# Altium PCB Boosty.PcbDoc
Units mm, origin at the board's own origin, x right, y up, seen from the top; angles counter-clockwise.
Board outline 152.4 x 101.6 mm, 2 copper layers (Top Layer, Bottom Layer); 44 components, 30 nets, 134 pads, 0 vias.
Unrouted connection lines stored in the file: 100.
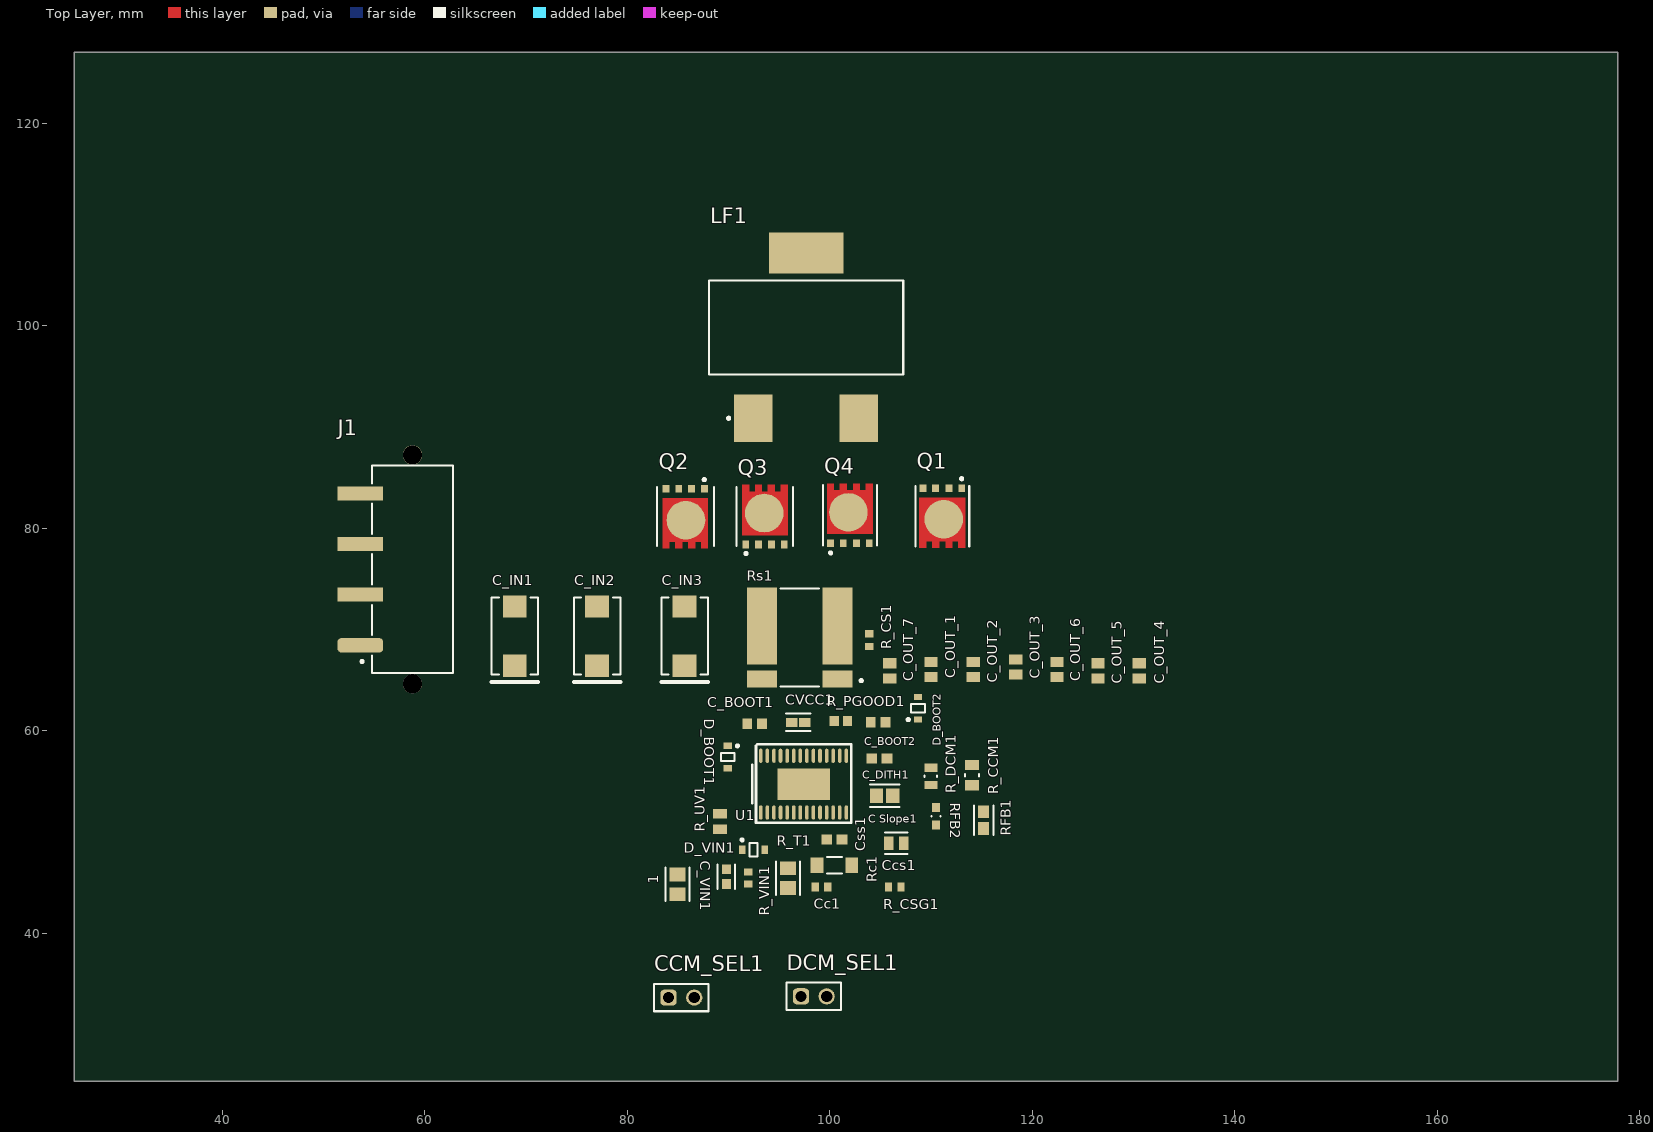
[diagram p0: Top Layer view]
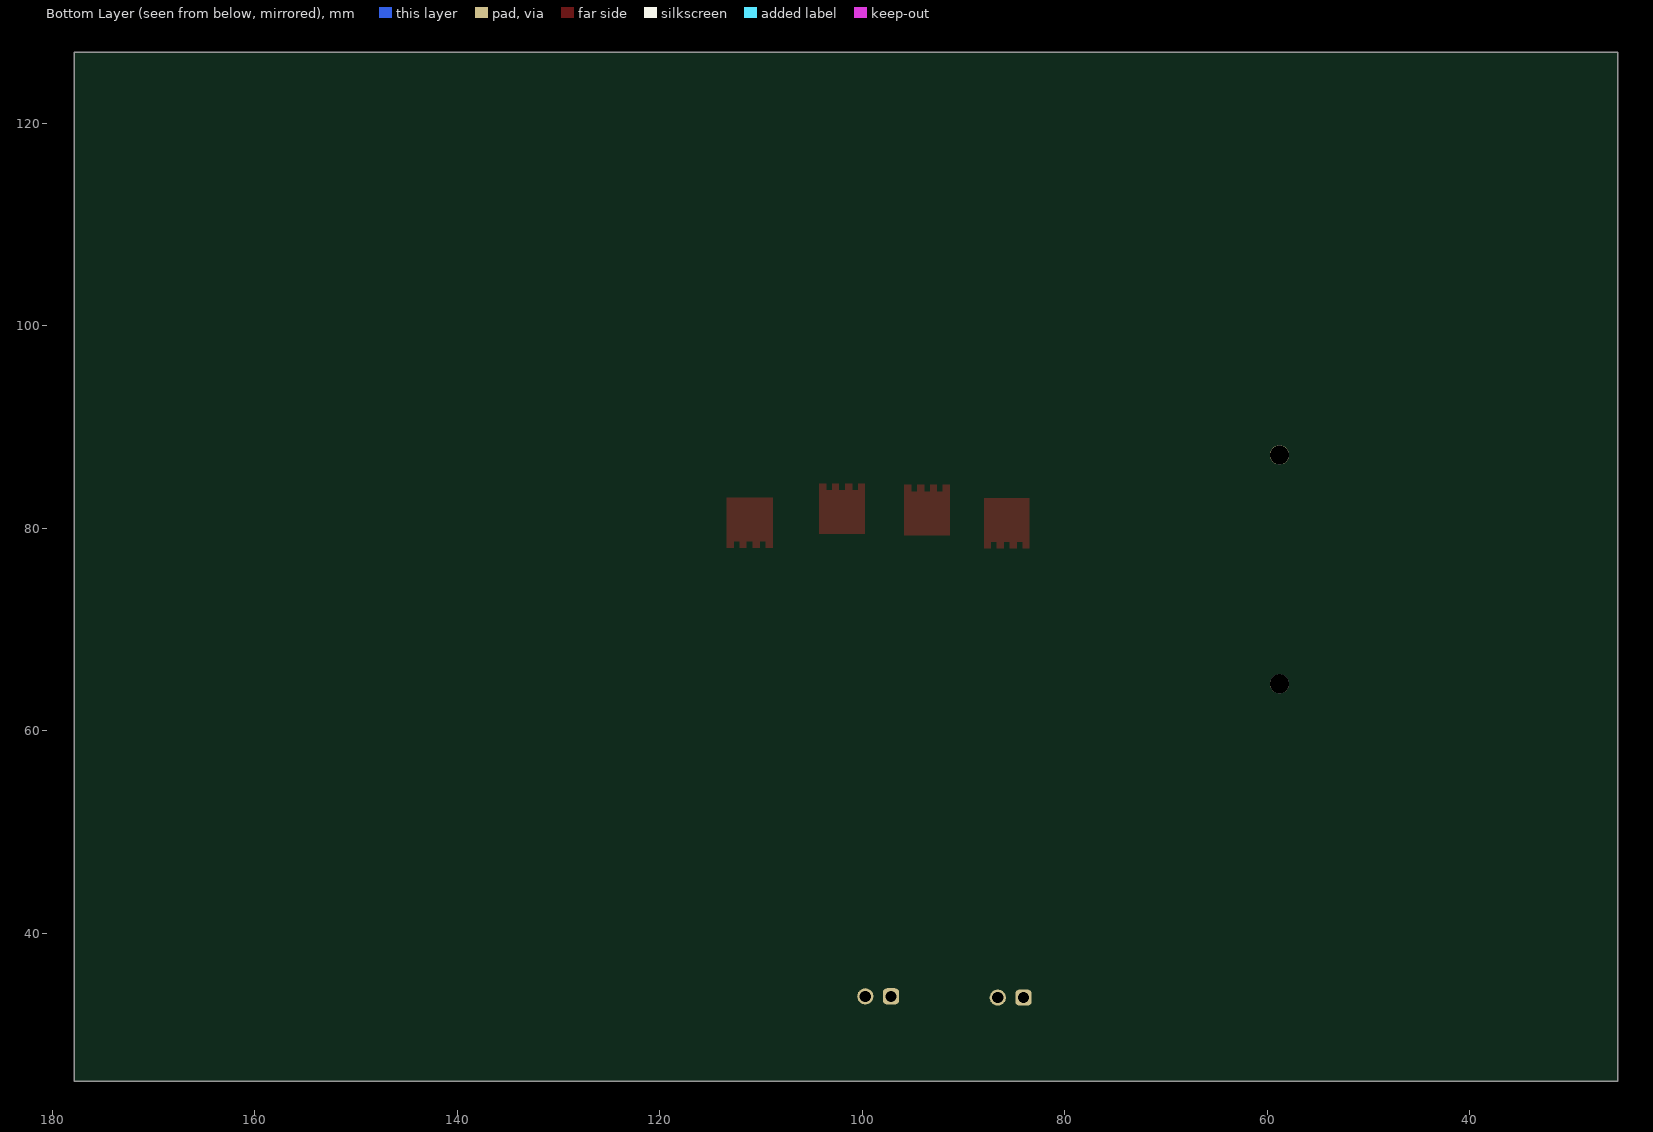
[diagram p1: Bottom Layer view, seen from below]

## Layer stack, top to bottom
Top Solder: solder mask 0.0102, Solder Resist, Dk 3.5
Top Layer: signal copper 0.0356
Dielectric 1: dielectric 0.32, FR-4, Dk 4.8
Bottom Layer: signal copper 0.0356
Bottom Solder: solder mask 0.0102, Solder Resist, Dk 3.5

## Board outline
25.4,25.4 177.8,25.4 177.8,127 25.4,127

## Design rules (kind name [scope] priority, off if disabled: settings)
BoardOutlineClearance [All] p1: gap=0.3 ignorepadtopadclearanceinfootprint=FALSE except(0.4: Arc-SplitBarrior Arc-SplitContinuation Track-SplitBarrior Track-SplitContinuation SMDPad-SplitBarrior SMDPad-SplitContinuation THPad-SplitBarrior THPad-SplitContinuation Via-SplitBarrior Via-SplitContinuation Fill-SplitBarrior Fill-SplitContinuation Poly-SplitBarrior Poly-SplitContinuation Region-SplitBarrior Region-SplitContinuation Text-SplitBarrior Text-SplitContinuation)
Clearance "Clearance Different Nets" [All] p1: gap=0.2 ignorepadtopadclearanceinfootprint=FALSE except(0.089: Arc-Arc Arc-Track Arc-SMDPad Track-Track Track-SMDPad; 0.127: SMDPad-SMDPad SMDPad-Via THPad-Via Via-Via; 0.254: Arc-Via Arc-Text Track-Via Track-Text SMDPad-Text THPad-Text Via-Text Fill-Text Poly-Text Region-Text Text-Text; 0.5: THPad-THPad Via-Hole)
Clearance "Clearance Same Nets" [All] p2: gap=0.2 ignorepadtopadclearanceinfootprint=FALSE except(0.089: Arc-Arc Arc-Track Arc-SMDPad Track-Track Track-SMDPad SMDPad-SMDPad; 0.127: SMDPad-Via THPad-Via; 0.254: Arc-Via Arc-Text Track-Via Track-Text SMDPad-Text THPad-Text Via-Via Via-Text Fill-Text Poly-Text Region-Text Text-Text)
Clearance "Clearance Bottom Layer" [OnLayer('Bottom Layer')] p3: gap=0.203 ignorepadtopadclearanceinfootprint=TRUE except(0.254: Arc-Text Track-Text SMDPad-Text THPad-Text Via-Text Fill-Text Poly-Text Region-Text Text-Text)
Clearance "Clearance Top Layer" [OnLayer('Top Layer')] p4: gap=0.203 ignorepadtopadclearanceinfootprint=TRUE except(0.254: Arc-Text Track-Text SMDPad-Text THPad-Text Via-Text Fill-Text Poly-Text Region-Text Text-Text)
HoleSize [All] p1: absolutevalues=TRUE maxlimit=6.3 minlimit=0.2 maxpercent=80.000 minpercent=20.000
MinimumAnnularRing [All] p1: minimumring=0.13
MinimumSolderMaskSliver [All] p1: minsoldermaskwidth=0.1
PolygonConnect PolygonConnect_1 [All] p1: thpad.connectstyle=Relief thpad.reliefconductorwidth=0.508 thpad.reliefentries=4 thpad.polygonreliefangle="90 Angle" thpad.airgapwidth=0.254 smdpad.connectstyle=Relief smdpad.reliefconductorwidth=0.508 smdpad.reliefentries=4 smdpad.polygonreliefangle="90 Angle" smdpad.airgapwidth=0.254 via.connectstyle=Direct via.reliefconductorwidth=0.508 via.reliefentries=4 via.polygonreliefangle="90 Angle" via.airgapwidth=0.254
RoutingCorners [All] p1: cornerstyle=Round minsetback=2.54 maxsetback=2.54
RoutingVias [All] p1: holewidth=0.5 width=1 viastyle="Through Hole" minholewidth=0.2 minwidth=0.35 maxholewidth=1 maxwidth=2
SilkToSilkClearance [All] p1: silktosilkclearance=0.1
SilkToSolderMaskClearance [IsPad] p1: minsilkscreentomaskgap=0.1 clearancetoexposedcopper=TRUE
SolderMaskExpansion [All] p1: expansion=0.102 istentingtop=FALSE
Width [All] p1: maxlimit=2.54 minlimit=0.089 preferedwidth=0.381
25 further rules are at their usual default settings.

## Classes and differential pairs
component class Boosty: 1 "C Slope1" C_BOOT1 C_BOOT2 C_DITH1 C_IN1 C_IN2 C_IN3 C_OUT_1 C_OUT_2 C_OUT_3 C_OUT_7 C_VIN1 Cc1 CCM_SEL1 Ccs1 Css1 CVCC1 D_BOOT1 D_BOOT2 D_VIN1 DCM_SEL1 J1 LF1 Q1 Q2 Q4 R_CCM1 R_CS1 R_CSG1 R_DCM1 R_PGOOD1 R_T1 R_UV1 R_VIN1 Rc1 RFB2 Rs1 U1

## Components (designator, comment, footprint, x,y, rotation, side; value= is the part's Value field where it differs from the comment)
1 "RUV2" FP-RG2012-IPC_A 84.963,44.831 r90 top
"C Slope1" "150pF" FP-0805-L_2_01_0_2-W_1_25-IPC_B 105.41,53.594 r180 top
C_BOOT1 "0.1uF" CAPC1608X90X35ML10T15 92.583,60.706 r0 top value=100nF
C_BOOT2 "0.1uF" CAPC1608X90X35ML10T15 104.775,60.833 r180 top value=100nF
C_DITH1 "39nF" CAPC1608X90X35NL15T15 104.902,57.277 r180 top
C_IN1 "293D106X9050E2TE3" VISH-293D-E_L 68.897,69.342 r90 top
C_IN2 "293D106X9050E2TE3" VISH-293D-E_L 77.025,69.342 r90 top
C_IN3 "293D106X9050E2TE3" VISH-293D-E_L 85.661,69.342 r90 top
C_OUT_1 "GRM21BR71H473KA01L" CAPC2013X135X45LL10T25 109.982,66.052 r90 top
C_OUT_2 "GRM21BR71H473KA01L" CAPC2013X135X45LL10T25 114.173,66.052 r90 top
C_OUT_3 "GRM21BR71H473KA01L" CAPC2013X135X45LL10T25 118.364,66.306 r90 top
C_OUT_4 "GRM21BR71H473KA01L" CAPC2013X135X45LL10T25 130.556,65.925 r90 top
C_OUT_5 "GRM21BR71H473KA01L" CAPC2013X135X45LL10T25 126.492,65.925 r90 top
C_OUT_6 "GRM21BR71H473KA01L" CAPC2013X135X45LL10T25 122.428,66.052 r90 top
C_OUT_7 "GRM21BR71H473KA01L" CAPC2013X135X45LL10T25 105.918,65.925 r90 top
C_VIN1 "GRM188R72A104KA35D" FP-GRM188-0_1-e0_2_0_5-IPC_B 89.789,45.593 r270 top
Cc1 "0.33nF" CAPC1608X92X38LL15T08 99.187,44.577 r0 top
CCM_SEL1 "61300211121" 61300211121 85.344,33.655 r0 top
Ccs1 "100pF" FP-C0805C-DN-MFG 106.553,48.895 r0 top value="100 pF"
Css1 "47nF" CAPC1608X90X35NL15T15 100.457,49.276 r180 top
CVCC1 "C1608X5R1H105K080AB" FP-C1608-080-0_1-IPC_B 96.901,60.833 r180 top value=1uF
D_BOOT1 "Shottkley" ONSC-SOD-323-2-477-02_V 89.916,57.404 r270 top
D_BOOT2 "Shottkley" ONSC-SOD-323-2-477-02_V 108.712,62.23 r90 top
D_VIN1 "Shottkley" ONSC-SOD-323-2-477-02_V 92.456,48.26 r0 top
DCM_SEL1 "61300211121" 61300211121 98.425,33.782 r0 top
J1 "691709710304" 691709710304 58.801,75.946 r90 top
LF1 "SER2011-202MLD" COIL-SER2011-3_V 97.663,99.822 r0 top
Q1 "CSD16321Q5" FP-DQH0008A-0 111.111,81.191 r270 top
Q2 "CSD18563Q5A" FP-DQJ0008A-MFG 85.725,81.153 r270 top
Q3 "CSD18563Q5A" FP-DQJ0008A-MFG 93.599,81.153 r90 top
Q4 "CSD16321Q5" FP-DQH0008A-0 101.981,81.28 r90 top
R_CCM1 "93.1k" FP-RN732A-MFG 114.046,55.626 r90 top value=93.1KΩ
R_CS1 "100ohm" RESC1608X55X30LL15T15 103.886,68.961 r270 top
R_CSG1 "100ohm" RESC1608X55X30LL15T15 106.426,44.577 r0 top
R_DCM1 "49.9k" FP-CRCW0805-e3-IPC_C 109.982,55.499 r90 top
R_PGOOD1 "ERA-3YEB203V" RESC1608X55X30NL20T20 101.092,60.96 r180 top
R_T1 "61.9K" FP-RG2012-IPC_A 95.885,45.466 r90 top value=61.9kR
R_UV1 "200k 0805" RESC2013X70X40LL20T20 89.154,51.054 r270 top
R_VIN1 "2.2" RESC1609X50X30LL10T20 91.948,45.466 r90 top
Rc1 "24.3k" FP-CR1206-MFG 100.457,46.736 r180 top
RFB1 "3.48k" FP-ERA3A-IPC_A 115.189,51.181 r270 top value=3.48kR
RFB2 "100k" FP-RC0603-0_55-MFG 110.49,51.562 r270 top value=100kR
Rs1 "4m" FP-WSL3637-MFG 97.028,69.215 r180 top
U1 "LM5175PWPR" LM5175PWPR 97.409,54.737 r90 top

## Footprints (in the part's own frame and the unit in brackets; to place one, negate y for a bottom-side part, rotate by r counter-clockwise, add the part's x,y. Pads: shape width x height; smd on the part's side, far side on the other; paste and mask are expansions set on the pad)
61300211121 [mm] "Pin Header, pitch 2.54 mm, THT, Vertical, single row, 2p"
  rrect50% 1.6x1.6 hole 1.1: 1(-1.27,0)
  round 1.6 hole 1.1: 2(1.27,0)
  silkscreen extent -2.69,-1.35 2.69,1.35, body extent -2.54,-1.27 2.54,1.27, height 8.57
691709710304 [mm] "Horizontal Entry SMT with Pressure Clamp, pitch 5mm, 04p"
  rrect50% 1.4x4.5 smd: 1(-7.5,5.15)
  rect 1.4x4.5 smd: 2(-2.5,5.15) 3(2.5,5.15) 4(7.5,5.15)
  round 1.9 hole 1.9 unplated: M1(-11.3,0) M2(11.3,0)
  silkscreen extent -10.25,-4 10.25,5.1, body extent -12,-4 12,7, height 9.95
CAPC1608X90X35ML10T15 [mm] "Chip Capacitor, 2-Leads, Body 1.7x0.9mm, IPC Low Density"
  rect 0.95x1.05 smd: 1(-0.725,0) 2(0.725,0)
  body extent -0.85,-0.45 0.85,0.45, height 0.9
CAPC1608X90X35NL15T15 [mm] "Chip Capacitor, 2-Leads, Body 1.60x0.81mm, IPC Medium Density"
  rect 1.05x1 smd: 1(-0.75,0) 2(0.75,0)
  body extent -0.88,-0.48 0.87,0.48, height 0.9
CAPC1608X92X38LL15T08 [mm] "Chip Capacitor, 2-Leads, Body 1.60x0.80mm, IPC High Density"
  rect 0.75x0.9 smd: 1(-0.625,0) 2(0.625,0)
  body extent -0.87,-0.48 0.87,0.48, height 0.92
CAPC2013X135X45LL10T25 [mm] "Chip Capacitor, 2-Leads, Body 2.00x1.25mm, IPC High Density"
  rect 1x1.3 smd: 1(-0.75,0) 2(0.75,0)
  body extent -1.05,-0.67 1.05,0.68, height 1.35
COIL-SER2011-3_V [mm] "SMD, 3-Leads, Body 19.18x9.27mm, Height 10.67mm"
  rect 3.81x4.7 smd: 1(-5.205,-8.96) 2(5.205,-8.96)
  rect 7.37x4.06 smd: 3(0,7.36)
  silkscreen extent -9.59,-9.08 9.59,4.63, body extent -9.59,-4.63 9.59,4.64, height 10.67
FP-0805-L_2_01_0_2-W_1_25-IPC_B [mm]
  rect 1.305x1.456 smd paste+0 mask+0: 1(-0.806,0) 2(0.806,0)
  silkscreen extent -1.46,-1.13 1.46,1.13, body extent -1.71,-0.98 1.71,0.98, height 0.25
FP-C0805C-DN-MFG [mm]
  rect 0.95x1.35 smd paste+0 mask+0: 1(-0.75,0) 2(0.75,0)
  silkscreen extent -1.1,-1.07 1.1,1.07, body extent -1.4,-0.85 1.4,0.85, height 0.25
FP-C1608-080-0_1-IPC_B [mm]
  rect 1.131x0.912 smd paste+0 mask+0: 1(-0.641,0) 2(0.641,0)
  silkscreen extent -1.21,-0.86 1.21,0.86, body extent -1.46,-0.71 1.46,0.71, height 0.25
FP-CR1206-MFG [mm]
  rect 1.25x1.5 smd paste+0 mask+0: 1(-1.725,0) 2(1.725,0)
  silkscreen extent -0.72,-0.82 0.72,0.82, body extent -2.45,-0.92 2.45,0.92, height 0.25
FP-CRCW0805-e3-IPC_C [mil]
  rect 31.75x51.5 smd paste+0 mask+0: 1(-33.5,0) 2(33.5,0)
  silkscreen extent -3,-25 3,25, body extent -53,-31 53,31, height 10
FP-DQH0008A-0 [mm]
  rect 0.75x0.675 smd paste+0 mask+0: 1(-2.752,1.917) 2(-2.752,0.66) 3(-2.752,-0.66) 4(-2.752,-1.917)
  round 3.805 smd paste+0 mask+0: 5-6-7-8(0.292,0.141)
  Top Layer region: 3.127,2.255 3.127,1.58 2.472,1.58 2.472,0.997 3.127,0.997 3.127,0.322 2.472,0.322 2.472,-0.323 3.127,-0.323 3.127,-0.998 2.472,-0.998 2.472,-1.58 3.127,-1.58 3.127,-2.255 -1.823,-2.255 -1.823,2.255
  silkscreen extent -3.83,-2.66 3,2.66, body extent -3.23,-2.65 3.23,2.65, height 0.25
FP-DQJ0008A-MFG [mm]
  rect 0.75x0.675 smd paste-1000 mask+0: 1(-2.752,1.905) 2(-2.752,0.635) 3(-2.752,-0.635) 4(-2.752,-1.905)
  round 3.821 smd paste-1000 mask+0: 5-6-7-8(0.35,0.07)
  Top Layer region: -1.823,2.242 3.127,2.242 3.127,1.568 2.472,1.568 2.472,0.972 3.127,0.972 3.127,0.298 2.472,0.298 2.472,-0.298 3.127,-0.298 3.127,-0.972 2.472,-0.972 2.472,-1.568 3.127,-1.568 3.127,-2.242 -1.823,-2.242 -1.823,2.242
  silkscreen extent -3.77,-2.78 2.9,2.82, body extent -3.23,-2.6 3.23,2.6, height 0.25
FP-ERA3A-IPC_A [mm]
  rect 1.255x1.106 smd paste+0 mask+0: 1(-0.826,0) 2(0.826,0)
  silkscreen extent -1.45,-0.95 1.45,0.95, body extent -1.95,-1.05 1.95,1.05, height 0.25
FP-GRM188-0_1-e0_2_0_5-IPC_B [mm]
  rect 0.959x0.912 smd paste+0 mask+0: 1(-0.727,0) 2(0.727,0)
  silkscreen extent -1.21,-0.86 1.21,0.86, body extent -1.46,-0.71 1.46,0.71, height 0.25
FP-RC0603-0_55-MFG [mm]
  rect 0.9x0.8 smd paste+0 mask+0: 1(-0.85,0) 2(0.85,0)
  silkscreen extent -0.03,-0.45 0.03,0.45, body extent -1.4,-0.55 1.4,0.55, height 0.25
FP-RG2012-IPC_A [mm]
  rect 1.355x1.556 smd paste+0 mask+0: 1(-0.976,0) 2(0.976,0)
  silkscreen extent -1.65,-1.18 1.65,1.18, body extent -2.15,-1.28 2.15,1.28, height 0.25
FP-RN732A-MFG [mm]
  rect 1x1.35 smd paste+0 mask+0: 1(-1,0) 2(1,0)
  silkscreen extent -0.13,-0.7 0.13,0.7, body extent -1.6,-0.8 1.6,0.8, height 0.25
FP-WSL3637-MFG [mm]
  rect 2.95x1.68 smd paste+0 mask+0: 1(-3.735,4.115) 2(3.735,4.115)
  rect 2.95x7.62 smd paste+0 mask+0: 3(-3.735,-1.145) 4(3.735,-1.145)
  silkscreen extent -6.2,-4.83 1.89,4.83, body extent -5.31,-5.05 5.31,5.05, height 0.25
LM5175PWPR [mm]
  oval 1.4x0.35 smd: 1(-2.8,4.225) 2(-2.8,3.575) 3(-2.8,2.925) 4(-2.8,2.275) 5(-2.8,1.625) 6(-2.8,0.975) 7(-2.8,0.325) 8(-2.8,-0.325) 9(-2.8,-0.975) 10(-2.8,-1.625) 11(-2.8,-2.275) 12(-2.8,-2.925) 13(-2.8,-3.557) 14(-2.8,-4.225) 15(2.8,-4.225) 16(2.8,-3.575) 17(2.8,-2.925) 18(2.8,-2.275) 19(2.8,-1.625) 20(2.8,-0.975) 21(2.8,-0.325) 22(2.8,0.325) 23(2.8,0.975) 24(2.8,1.625) 25(2.8,2.275) 26(2.8,2.925) 27(2.8,3.575) 28(2.8,4.225)
  rect 3.1x5.18 smd: 29(0,0)
  silkscreen extent -3.81,-4.7 3.94,5.08
ONSC-SOD-323-2-477-02_V [mm] "SOD, 2-Leads, Body 1.7x1.25mm"
  rect 0.63x0.83 smd: 1(-1.115,0) 2(1.115,0)
  silkscreen extent -1.24,-0.67 0.4,1.09, body extent -0.85,-0.63 0.85,0.63, height 1.06
RESC1608X55X30LL15T15 [mm] "Chip Resistor, 2-Leads, Body 1.60x0.80mm, IPC High Density"
  rect 0.7x0.85 smd: 1(-0.625,0) 2(0.625,0)
  body extent -0.87,-0.48 0.87,0.48, height 0.55
RESC1608X55X30NL20T20 [mm] "Chip Resistor, 2-Leads, Body 1.60x0.80mm, IPC Medium Density"
  rect 0.9x1 smd: 1(-0.65,0) 2(0.65,0)
  body extent -0.9,-0.5 0.9,0.5, height 0.55
RESC1609X50X30LL10T20 [mm] "Chip Resistor, 2-Leads, Body 1.55x0.85mm, IPC High Density"
  rect 0.7x0.85 smd: 1(-0.575,0) 2(0.575,0)
  body extent -0.82,-0.48 0.82,0.48, height 0.5
RESC2013X70X40LL20T20 [mm] "Chip Resistor, 2-Leads, Body 2.00x1.25mm, IPC High Density"
  rect 0.95x1.35 smd: 1(-0.775,0) 2(0.775,0)
  body extent -1.1,-0.72 1.1,0.72, height 0.7
VISH-293D-E_L [mm] "Molded Capacitor, 2-Leads, Body 7.6x4.6mm, IPC High Density"
  rect 2.2x2.35 smd: 1(-2.925,0) 2(2.925,0)
  silkscreen extent -4.52,-2.3 3.8,2.3, body extent -4.02,-2.3 4.02,2.3, height 4.3

## Part data
1: library part CMP-28537-010509-1, "Automotive Metal Thin Film Chip Resistor, 0805, 52.3kΩ, 0.1%, 25ppm/°C, 0.125W, 150V", Case Code (Imperial)=0805, Case Code (Metric)=2012, Max Operating Temperature=155°C, Max Power Dissipation=125mW, Min Operating Temperature=-55°C, Resistance=52.3kR, Resistor Type="Thin Film", Temperature Coefficient=25ppm/°C, Tolerance=0.1%, Voltage Rating=150V, Case/Package=0805, Features="Automotive AEC-Q200", Height=0.4mm, Lead Free="Lead Free", Length=2mm, Number of Terminations=2, Packaging="Tape and Reel", Power Rating=125mW, RoHS Compliant=Yes, Series=RG, Termination=SMD/SMT, Voltage Rating (DC)=150V, Weight=0.000194oz, Width=1.2mm
"C Slope1": library part CMP-2007-04584-2, "General Purpose Ceramic Capacitor, 0805, 150pF, 5%, C0G, 30ppm/°C, 200V", Case Code (Imperial)=0805, Case Code (Metric)=2012, Dielectric=C0G, Max Operating Temperature=125°C, Min Operating Temperature=-55°C, Package Quantity=1, Temperature Coefficient=30ppm/°C, Tolerance=5%, Voltage=200V, Capacitance=150pF, Case/Package=0805, Construction=Flat, Contact Plating=Tin, Depth=1.25mm, Dissipation Factor=10%, Height=0.94mm, Lead Free="Lead Free", Length=2.01mm, Mount="Surface Mount", Number of Pins=2, Packaging="Tape and Reel", Radiation Hardening=No, REACH SVHC="No SVHC", RoHS Compliant=Yes, Series=-, Termination=SMD/SMT, Thickness=0.037inch, Voltage Rating=200V, Voltage Rating (DC)=200V, Width=1.25mm
C_BOOT1 C_BOOT2: library part CMP-2100-03643-1, "Chip Capacitor, 0.1 uF, +/- 10%, 50 V, -55 to 125 degC, 0603 (1608 Metric), RoHS, Tape and Reel", Capacitance=100nF, Case Code (Imperial)=0603, Case Code (Metric)=1608, Dielectric=X7R, Dielectric Material=Ceramic, Insulation Resistance=10GR, Manufacturer=Murata, Max Operating Temperature=125degC, Min Operating Temperature=-55degC, Package Description="2-Pin Surface Mount Device, Body 1.6 x 0.8 mm", Package Quantity=1, Tolerance=10%, Voltage=50V, Case/Package=0603, Contact Plating=Tin, Datasheet URL=http://psearch.en.murata.com/capacitor/product/GRM188R71H104KA93%23.pdf, Datasheet Version=42675.0, Depth=0.8mm, Height=0.8mm, Lead Free=LeadFree, Length=1.6mm, Manufacturer URL=http://www.murata.com/, Material=Ceramic, Mount=SurfaceMount, Number of Pins=2, Package Reference=0603, Packaging=TapeandReel, Radiation Hardening=No, REACH SVHC=NoSVHC, RoHSCompliant=true, Termination=SMD/SMT, Thickness=0.035inch, Voltage Rating=50V, Voltage Rating (DC)=50V, Width=0.8mm
C_DITH1: library part CMP-2006-04434-1, Manufacturer="AVX Interconnect / Elco", Part Number=06035C393KAT2A
C_IN1 C_IN2 C_IN3: library part CMP-2000-05556-1, "Tantalum Capacitor, 10 uF, +/- 10%, 50 V, -55 to 125 degC, 2-Pin SMD (7343-43), RoHS, Tape and Reel", Capacitance=10000000pF, Case Code=E, Case Style=Molded, Manufacturer=Vishay, Operating Temp Range=-55Cto125C, Package / Case=7343-43, Package Description="2-Pin Surface Mount Device, Body 7.3 x 4.3 mm", Package Reference=293D-E, Tolerance (+ or -)=10%, Voltage=50VDC, Construction=SMTChip, Datasheet URL=http://www.vishay.com/docs/40002/293d.pdf, Datasheet Version=08/2016, DCL=5uA, DELETED=Compliant, DF=6%, ESR=0.8ohm, Failure Rate=NotRequired, Insulation=NotRequired, Lead Spacing (nom)=NotRequiredmm, Length W/Weld=NotRequiredmm, Length W/Weld (max)=NotRequiredmm, Manufacturer URL=http://www.vishay.com/, Mounting Style=SurfaceMount, Mounting Technology=SurfaceMount, Packaging=TapeandReel, Polarity=Polar, Product Depth (mm)=4.3mm, Product Diameter (mm)=NotRequiredmm, Product Height (mm)=4mm, Product Length (mm)=7.3mm, Rad Hardened=No, Seal=NotRequired, Seated Plane Height=NotRequiredmm, Wire Form=NotRequired
C_OUT_1 C_OUT_2 C_OUT_3 C_OUT_4 C_OUT_5 C_OUT_6 C_OUT_7: library part CMP-2007-03587-1, Manufacturer=Murata, Part Number=GRM21BR71H473KA01L
C_VIN1: library part CMP-1035-02595-8, "Chip Multilayer Ceramic Capacitors for General Purpose, 0603, 0.10uF, X7R, 15%, 10%, 100V", Capacitance=100nF, Case Code (Imperial)=0603, Case Code (Metric)=1608, Dielectric=X7R, Max Operating Temperature=125°C, Min Operating Temperature=-55°C, Package Quantity=1, Tolerance=10%, Voltage=100V, Case/Package=0603, Depth=0.8mm, Height=0.8mm, Lead Free="Lead Free", Length=1.6mm, Material=Ceramic, Mount="Surface Mount", Packaging="Tape and Reel", Radiation Hardening=No, REACH SVHC="No SVHC", Termination=SMD/SMT, Thickness=0.035inch, Voltage Rating=100V, Voltage Rating (DC)=100V, Weight=0.000222oz, Width=0.8mm
Cc1: library part CMP-2006-01514-1, Manufacturer=Vitramon, Part Number=VJ0603D331KXAAJ
CCM_SEL1 DCM_SEL1: library part CMP-1712-00002-5, Color=Black, Contact Resistance=20mΩ, Current Rating=3A, Max Operating Temperature=125°C, Min Operating Temperature=-40°C, Operating Supply Voltage=250V, Connector Type="Male Pin", Contact Gender=Male, Contact Material=Copper, Contact Mating Length=5.9944mm, Contact Plating=Gold, Gender=Male, Height=8.94mm, Housing Material=PBT, Lead Free="Lead Free", Lead Pitch=2.54mm, Mount="Through Hole", NexarPartId=20081794, Number of Contacts=2, Number of Pins=2, Number of Positions=2, Number of Rows=1, Orientation=Vertical, Packaging=Bulk, Pitch=2.54mm, REACH SVHC="No SVHC", RoHS=Compliant, Termination="Through Hole", Voltage Rating=250V
Ccs1: library part CMP-03020-014281-1, "CAP CER 100PF 100V C0G/NP0 0805", Capacitance="100 pF", Manufacturer=KEMET, Manufacturer Part Number=C0805C101J1GACTU, Package=C0805C-DN, Temperature="-55°C to +125°C", Temperature Characteristic=C0G, Temperature Coefficient=30ppm/°C, Temperature Range High=+125°C, Temperature Range Low=-55°C, Tolerance=0.05, Voltage Rating="100 V", Automotive=No, Category=Cap, ComponentLink2Description=Datasheet, ComponentLink2URL=https://content.kemet.com/datasheets/KEM_C1003_C0G_SMD.pdf, Device Class L1="Passive Components", Device Class L2=Capacitors, Device Class L3="Ceramic Capacitors", Digikey Description="CAP CER 100PF 100V C0G/NP0 0805", Height=0.88mm, Ipc Land Pattern Name=CAPC200125X78, Lead Free=Yes, Material=Ceramic, Mouser Description="Multilayer Ceramic Capacitors MLCC - SMD/SMT 100volts 100pF C0G 5%", Octopart=https://octopart.com/c0805c101j1gactu-kemet-123666, RoHS=TRUE
Css1: library part CMP-2006-02074-1, Manufacturer="AVX Interconnect / Elco", Part Number=06035C473KAZ2A
CVCC1: library part CMP-2000-06025-2, "Multilayer Ceramic Capacitors 1μF ±10% 50V X5R SMD 0603", Capacitance=1uF, Case Code (Imperial)=0603, Case Code (Metric)=1608, Dielectric=X5R, Dielectric Material=Ceramic, Max Operating Temperature=85°C, Min Operating Temperature=-55°C, Package Quantity=1, Tolerance=10%, Voltage=50V, Case/Package=0603, Construction=Flat, Depth=0.8mm, Height=0.8mm, Lead Free="Lead Free", Length=1.6mm, Mount="Surface Mount", Number of Pins=2, Packaging="Tape and Reel", Radiation Hardening=No, REACH SVHC="No SVHC", Resistor Type=Ceramic, RoHS Compliant=Yes, Series=C, Termination=SMD/SMT, Thickness=0.035inch, Voltage Rating=50V, Voltage Rating (DC)=50V, Weight=7.1E-05oz, Width=0.031inch
D_BOOT1 D_BOOT2 D_VIN1: library part CMP-1055-00462-1, "Schottky Barrier Diode, 2-Pin SOD-323, Pb-Free, Tape and Reel", Manufacturer="On Semiconductor", PartNumber=BAT54HT1G, ComponentLink1Description="Manufacturer URL", ComponentLink1URL=http://www.onsemi.com/, ComponentLink2Description=Datasheet, ComponentLink2URL=http://www.onsemi.cn/pub_link/Collateral/BAT54HT1-D.PDF, ComponentLink3Description="Package Specification", ComponentLink3URL=http://www.onsemi.com/pub_link/Collateral/477-02.PDF.1, Configuration=Single, DatasheetVersion="Rev. 6", IFSM Max (A)=0.6, Mounting Technology="Surface Mount", PackageDescription="2-Pin SOD, Body 1.7 x 1.25 mm", PackageReference=SOD-323-2-477-02, PackageVersion="Rev. H, 03/2007", Packing="Tape and Reel", RoHS=TRUE, trr Max (ns)=5
J1: library part CMP-1502-03337-2, Color=Black, Current=6A, Flammability Rating="UL94 V-0", Max Operating Temperature=130°C, Min Operating Temperature=-40°C, Voltage=300V, Connector Type=Screw, Contact Material=Nickel, Contact Plating=Tin, Current Rating=6A, Height=10.2mm, Housing Material=Nylon, Lead Pitch=5mm, Length=20mm, Mount="Surface Mount", NexarPartId=34171771, Number of Contacts=4, Number of Levels=1, Number of Pins=4, Number of Positions=4, Number of Positions Per Level=4, Number of Rows=1, Packaging=Digi-Reel®, Pitch=5mm, Plating=Steel, REACH SVHC=Unknown, RoHS=Compliant, Termination=Screw, Voltage Rating=300V, Wire Gauge (Max)=30AWG, Wire Gauge (Min)=30AWG, Wire/Cable Gauge=30AWG
LF1: library part CMP-0837-00036-1, "Shielded Power Inductor, 2 uH, +/- 20%, 1.2 mOhm, 56 MHz, 37 A, -40 to 125 degC, 3-Pin SMD, RoHS, Reel", Ambient Temperature with Derated Current="85 to 125 degC", Ambient Temperature with Irms Current="-40 to 85 degC", Inductance +/- 20% (uH)=2, Manufacturer=Coilcraft, ComponentLink1Description="Manufacturer URL", ComponentLink1URL=http://www.coilcraft.com/, ComponentLink2Description=Datasheet, ComponentLink2URL=http://www.coilcraft.com/pdfs/ser2000.pdf, ComponentLink3Description="Package Specification", ComponentLink3URL=http://www.coilcraft.com/pdfs/ser2000.pdf, DatasheetVersion=09/2012, DCR typ (mOhm)=1.2, Isat (A)=37, Mounting Technology="Surface Mount", PackageDescription="3-Pin SMD, Body 19.18 x 9.27 mm, Height 10.67 mm", PackageReference=SER2011-3, PackageVersion=09/2012, Packing=Reel, PartNumber=SER2011-202MLD, RoHS=TRUE, SRF typ (MHz)=56
Q1 Q4: library part CMP-04962-000020-1, "MOSFET N-CH 25V 31A/100A 8VSON", Case/Package=SON, Continuous Drain Current (ID)=100A, Drain To Source Breakdown Voltage=25V, Drain To Source Resistance=2.4mR, Gate to Source Voltage (Vgs)=10V, Input Capacitance=3.1nF, Max Operating Temperature=150°C, Max Power Dissipation=3.1W, Min Operating Temperature=-55°C, Package Quantity=1, Threshold Voltage=1.1V, Contact Plating=Tin, Drain to Source Voltage (Vdss)=25V, Dual Supply Voltage=25V, Element Configuration=Single, Fall Time=17ns, Height=1.05mm, Lead Free="Contains Lead", Length=6.1mm, Mount="Surface Mount", Nominal Vgs=1.1V, Number of Elements=1, Number of Pins=8, Packaging="Tape and Reel", Polarity=N-CHANNEL, Power Dissipation=3.1W, Radiation Hardening=No, Rds On Max=2.4mR, REACH SVHC="No SVHC", Rise Time=15ns, RoHS Compliant=Yes, Series=NexFET™, Termination=SMD/SMT, Turn-Off Delay Time=27ns, Turn-On Delay Time=9ns, Width=5.1mm
Q2 Q3: library part CMP-04962-000004-1, "MOSFET N-CH 60V 100A 8SON", Continuous Drain Current=15A, Drain To Source Breakdown Voltage=60V, Drain To Source Resistance=5.7mΩ, Gate To Source Voltage=20V, Input Capacitace At Vds="1150pF @ 30V", Manufacturer="Texas Instruments", Max Forward Diode Voltage=1V, Max Junction Temp=+150°C, Package=DQJ0008A, Power Dissipation=3.2W, Temperature="-55°C to +150°C", Temperature Range Low=-55°C, Typ Forward Diode Voltage=0.8V, Automotive=No, Category=Trans, ComponentLink2Description=Datasheet, ComponentLink2URL=http://www.ti.com/lit/ds/symlink/csd18563q5a.pdf, Device Class L1="Discrete Semiconductors", Device Class L2=Transistors, Device Class L3=MOSFETs, Digikey Description="MOSFET N-CH 60V 100A 8SON", Drain To Source Voltage=60V, Gate Charge At Vgs="15nC @ 10V", Height=1.1mm, Lead Free=Yes, Manufacturer Part Number=CSD18563Q5A, Mouser Description="MOSFET 60V N-Channel NexFET Power MOSFET", Number Of Channels=1, Number Of N Channels=1, Octopart=https://octopart.com/csd18563q5a-texas+instruments-30331677, Reverse Recovery Charge=63nC, Reverse Recovery Time=49ns, RoHS=TRUE, Rthja Max=50°C/W, Temperature Range High=+150°C, Threshold Vgs Max=2.4V, Threshold Vgs Min=1.7V, Transconductance=60S, Turn Off Delay Time=11.4ns, Turn On Delay Time=3.2ns
R_CCM1: library part CMP-03211-004999-1, "SMD Chip Resistor, Thin Film, 93.1KΩ, 100 V, 0805 [2012 Metric], 100 mW, 0.1%, RN73 Series", Manufacturer="TE Connectivity", Manufacturer Part Number=RN73C2A93K1BTDF, Package=RN732A, Power Rating=0.1W, Resistance=93.1KΩ, Temperature="-55°C to 155°C", Temperature Coefficient=10ppm/°C, Temperature Range High=155°C, Temperature Range Low=-55°C, Tolerance=0.1%, Voltage Rating=100V, Automotive=No, Category=Res, ComponentLink2Description=Datasheet, ComponentLink2URL=https://www.te.com/commerce/DocumentDelivery/DDEController?Action=showdoc&DocId=Data+Sheet%7F1773270%7FP%7Fpdf%7FEnglish%7FENG_DS_1773270_P.pdf%7F1676162-2, Composition="Thin Film", Device Class L1="Passive Components", Device Class L2=Resistors, Device Class L3="Chip SMD Resistors", Height=0.65mm, Ipc Land Pattern Name=RESC200125X55, Lead Free=Yes, Octopart=https://octopart.com/rn73c2a93k1btdf-te+connectivity-42431925, octopart_url=https://octopart.com/rn73c2a93k1btdf-te+connectivity-42431925, Packaging="1000 Reel", RoHS=TRUE, Series=RN73
R_CS1 R_CSG1: library part CMP-2000-00179-1, Manufacturer=Panasonic, Part Number=ERJ-3EKF1000V
R_DCM1: library part CMP-2001-03952-2, "RES Thick Film, 49.9kΩ, 1%, 0.125W, 100ppm/°C, 0805", Case Code (Imperial)=0805, Case Code (Metric)=2012, Max Operating Temperature=155°C, Max Power Dissipation=125mW, Min Operating Temperature=-55°C, Package Quantity=10, Resistance=49.9kR, Temperature Coefficient=100ppm/°C, Tolerance=1%, Voltage Rating=150V, Case/Package=0805, Composition="Thick Film", Contact Plating=Tin, Depth=1.25mm, Features="Automotive AEC-Q200", Height=0.45mm, Lead Free="Lead Free", Length=2mm, Military Standard=Not, Mount="Surface Mount", Number of Terminations=2, Packaging="Tape and Reel", Power Rating=125mW, Radiation Hardening=No, Termination=SMD/SMT, Voltage Rating (DC)=150V, Weight=0.000194oz, Width=0.049inch
R_PGOOD1: library part CMP-2000-00169-1, Manufacturer=Panasonic, Part Number=ERA-3YEB203V
R_T1: library part CMP-28537-002774-1, "Automotive Metal Thin Film Chip Resistor, 0805, 61.9kΩ, 0.5%, 25ppm/°C, 0.125W, 150V", Case Code (Imperial)=0805, Case Code (Metric)=2012, Max Operating Temperature=155°C, Max Power Dissipation=125mW, Min Operating Temperature=-55°C, Package Quantity=5000, Resistance=61.9kR, Resistor Type="Thin Film", Temperature Coefficient=25ppm/°C, Tolerance=0.5%, Voltage Rating=150V, Case/Package=0805, Features="Automotive AEC-Q200", Height=0.02inch, Lead Free="Lead Free", Length=0.079inch, Number of Terminations=2, Packaging="Tape and Reel", Power Rating=125mW, RoHS Compliant=Yes, Series=RG, Termination=SMD/SMT, Voltage Rating (DC)=150V, Weight=0.000194oz, Width=0.049inch
R_UV1: library part CMP-2001-00028-1, Manufacturer=Panasonic, Part Number=ERJ-6ENF2003V
R_VIN1: library part CMP-2000-03207-1, Manufacturer="Vishay Dale", Part Number=CRCW06032R20FNEA
Rc1: library part CMP-07231-005081-1, "Thick Film Chip Resistors 1206 24.3kΩ 0.25W 1% 100ppm/°C", Case Code (Imperial)=1206, Case Code (Metric)=3216, Max Operating Temperature=155°C, Max Power Dissipation=250mW, Min Operating Temperature=-55°C, Package Quantity=5000, Resistance=24.3kR, Temperature Coefficient=100ppm/°C, Tolerance=1%, Voltage Rating=200V, Case/Package=1206, Composition="Thick Film", Contact Plating=Tin, Depth=1.6mm, Features="Moisture Resistant", Height=0.03inch, Length=3.2mm, Military Standard=Not, Mount="Surface Mount", Number of Terminations=2, Packaging="Tape and Reel", Power Rating=250mW, Radiation Hardening=No, Termination=SMD/SMT, Thickness=610um, Width=0.063inch
RFB1: library part CMP-05422-000099-1, "RES SMD 3.48KOHM 0.1% 1/10W 0603", Case Code (Imperial)=0603, Case Code (Metric)=1608, Max Operating Temperature=155°C, Max Power Dissipation=100mW, Min Operating Temperature=-55°C, Package Quantity=1, Resistance=3.48kR, Resistance Tolerance=0.1%, Resistor Type="Thin Film", Temperature Coefficient=25ppm/°C, Voltage Rating=150V, Voltage Rating (DC)=75V, Case/Package=0603, Construction=Rectangular, Contact Plating=Tin, Depth=0.8mm, Features="Automotive AEC-Q200", Height=0.45mm, Lead Free="Lead Free", Length=1.6mm, Military Standard=Not, Mount="Surface Mount", Number of Pins=2, Number of Terminations=2, Packaging="Tape and Reel", Power Rating=100mW, Radiation Hardening=No, RoHS Compliant=Yes, Series=ERA-3A, Technology="METAL FILM", Tolerance=0.1%, Width=0.8mm
RFB2: library part CMP-2100-03662-2, "RES SMD 100K OHM 1% 1/10W 0603", Case Code (Imperial)=0603, Case Code (Metric)=1608, Max Operating Temperature=155°C, Max Power Dissipation=100mW, Min Operating Temperature=-55°C, Resistance=100kR, Resistance Tolerance=1%, Resistor Type="Thick Film", Temperature Coefficient=100ppm/°C, Voltage Rating=50V, Working Voltage=75V, Case/Package=0603, Construction=Rectangular, Depth=0.8mm, Features="Moisture Resistant", Height=0.45mm, Lead Free="Lead Free", Length=1.6mm, Military Standard=Not, Number of Pins=2, Number of Terminations=2, Packaging="Tape and Reel", Power Rating=100mW, REACH SVHC="No SVHC", RoHS Compliant=Yes, Series=RC, Technology="THICK FILM", Termination=SMD/SMT, Tolerance=1%, Voltage Rating (DC)=50V, Width=0.8mm
Rs1: library part CMP-00030-39744887-1, "WSL36374L000FEA SMD Chip Resistor, 4 MOhm, ± 1%, 3 W, 3637 [9194 Metric], Metal Strip, Power", Case Code (Imperial)=3637, Case Code (Metric)=9194, Max Operating Temperature=170°C, Min Operating Temperature=-65°C, Power Rating=3W, Resistance=4mΩ, Temperature Coefficient=50ppm/°C, Tolerance=1%, Voltage Rating=100mV, Case/Package=3637, Composition="Metal Element, Metal Film, Metal Strip", Contact Plating=Tin, Depth=9.4mm, Height=635µm, Lead Free="Lead Free", Length=9.14mm, Military Standard=Not, NexarPartId=39744887, Number of Pins=2, Packaging="Cut Tape", Radiation Hardening=No, REACH SVHC="No SVHC", RoHS=Compliant, Schedule B="8533210025, 8533210025", Termination=SMD/SMT, Voltage Rating (AC)=100mV, Voltage Rating (DC)=100mV, Width=9.4mm

## Nets (pads, with @x,y where several pads share a name; then routed paths per layer and width w, separated by ;. In a path a pad name is that pad's centre, name@x,y a point inside that pad or via, vN(x,y) a via of type N, cw(c..) or ccw(c..) an arc to the next point about the centre after c; other vN are vias at no path point)
AGND: 1.1 "C Slope1.1" C_DITH1.1 C_IN1.2 C_IN2.2 C_IN3.2 C_OUT_1.1 C_OUT_2.1 C_OUT_3.1 C_OUT_4.1 C_OUT_5.1 C_OUT_6.1 C_OUT_7.1 C_VIN1.2 Cc1.1 Css1.1 CVCC1.1 DCM_SEL1.2 J1.2 J1.4 R_CCM1.1 R_CSG1.1 R_DCM1.1 R_T1.1 RFB1.1 Rs1.1 Rs1.3 U1.10 U1.22 U1.29
CS: Q3.1 Q3.2 Q3.3 Q4.1 Q4.2 Q4.3 R_CS1.1 Rs1.2 Rs1.4
EN: 1.2 R_UV1.1 U1.1
FB: RFB1.2 RFB2.1 U1.11
HDRV2: Q1.4 U1.19
LDRV2: Q4.4 U1.21
MODE: CCM_SEL1.2 DCM_SEL1.1 R_CCM1.2 R_DCM1.2
"NetC Slope1_2": "C Slope1.2" U1.7
NetC_BOOT1_2: C_BOOT1.2 D_BOOT1.1 U1.26
NetC_BOOT2_1: C_BOOT2.1 D_BOOT2.1 U1.20
NetC_BOOT2_2: C_BOOT2.2 U1.18
NetC_DITH1_2: C_DITH1.2 U1.5
NetC_VIN1_1: C_VIN1.1 R_VIN1.1 U1.2
NetCc1_2: Cc1.2 Rc1.1
NetCcs1_1: Ccs1.1 R_CS1.2 U1.16
NetCcs1_2: Ccs1.2 R_CSG1.2 U1.15
NetCss1_2: Css1.2 U1.8
NetCVCC1_2: CVCC1.2 U1.23
NetD_VIN1_1: D_VIN1.1 R_VIN1.2
NetLF1_2: LF1.2 Q1.1 Q1.2 Q1.3 Q4.5-6-7-8
NetQ2_4: Q2.4 U1.27
NetQ3_4: Q3.4 U1.25
NetR_PGOOD1_1: R_PGOOD1.1 U1.17
NetR_T1_2: R_T1.2 U1.6
NetRc1_2: Rc1.2 U1.9
NetU1_13: U1.13 U1.14
SW1: C_BOOT1.1 LF1.1 Q2.1 Q2.2 Q2.3 Q3.5-6-7-8 U1.28
VCC: CCM_SEL1.1 D_BOOT1.2 D_BOOT2.2 R_PGOOD1.2
VIN: C_IN1.1 C_IN2.1 C_IN3.1 D_VIN1.2 J1.1 Q2.5-6-7-8 R_UV1.2 U1.3
VOUT: C_OUT_1.2 C_OUT_2.2 C_OUT_3.2 C_OUT_4.2 C_OUT_5.2 C_OUT_6.2 C_OUT_7.2 J1.3 Q1.5-6-7-8 RFB2.2 U1.12 U1.24
pads on no net: J1.M1 J1.M2 LF1.3 U1.4